# EAGLE board guava1_2 (EAGLE 8.0.0)
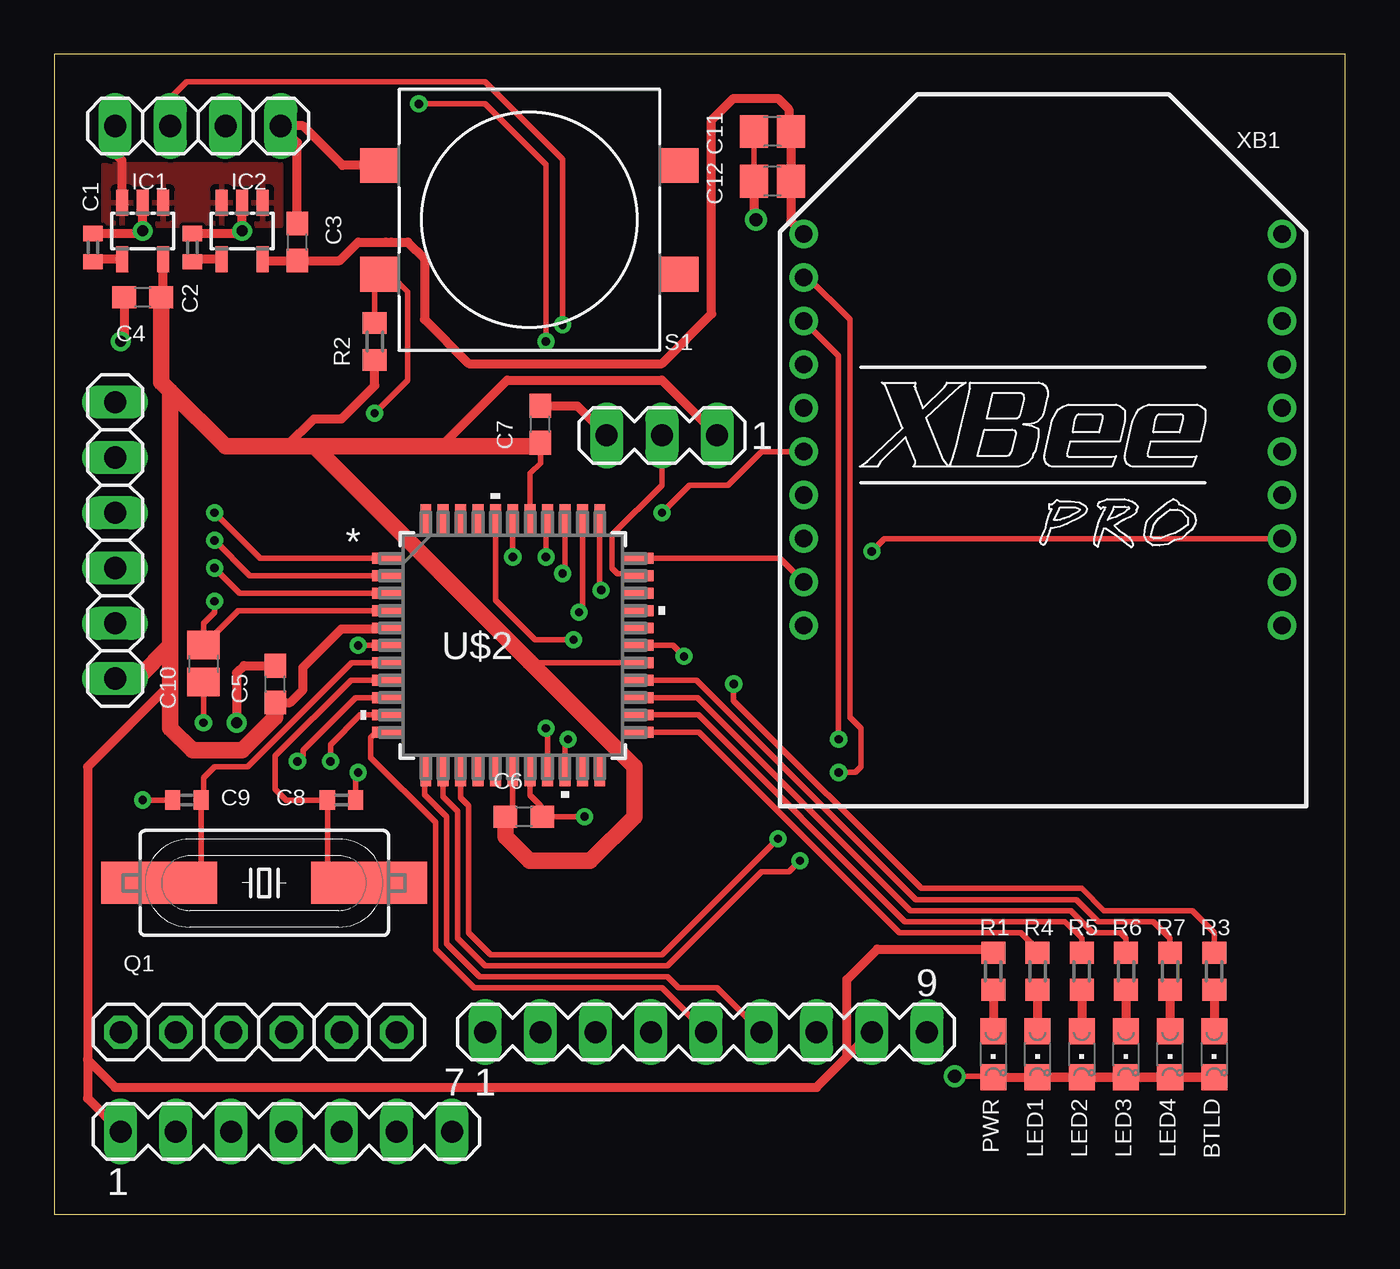
[diagram p0: board, top side]
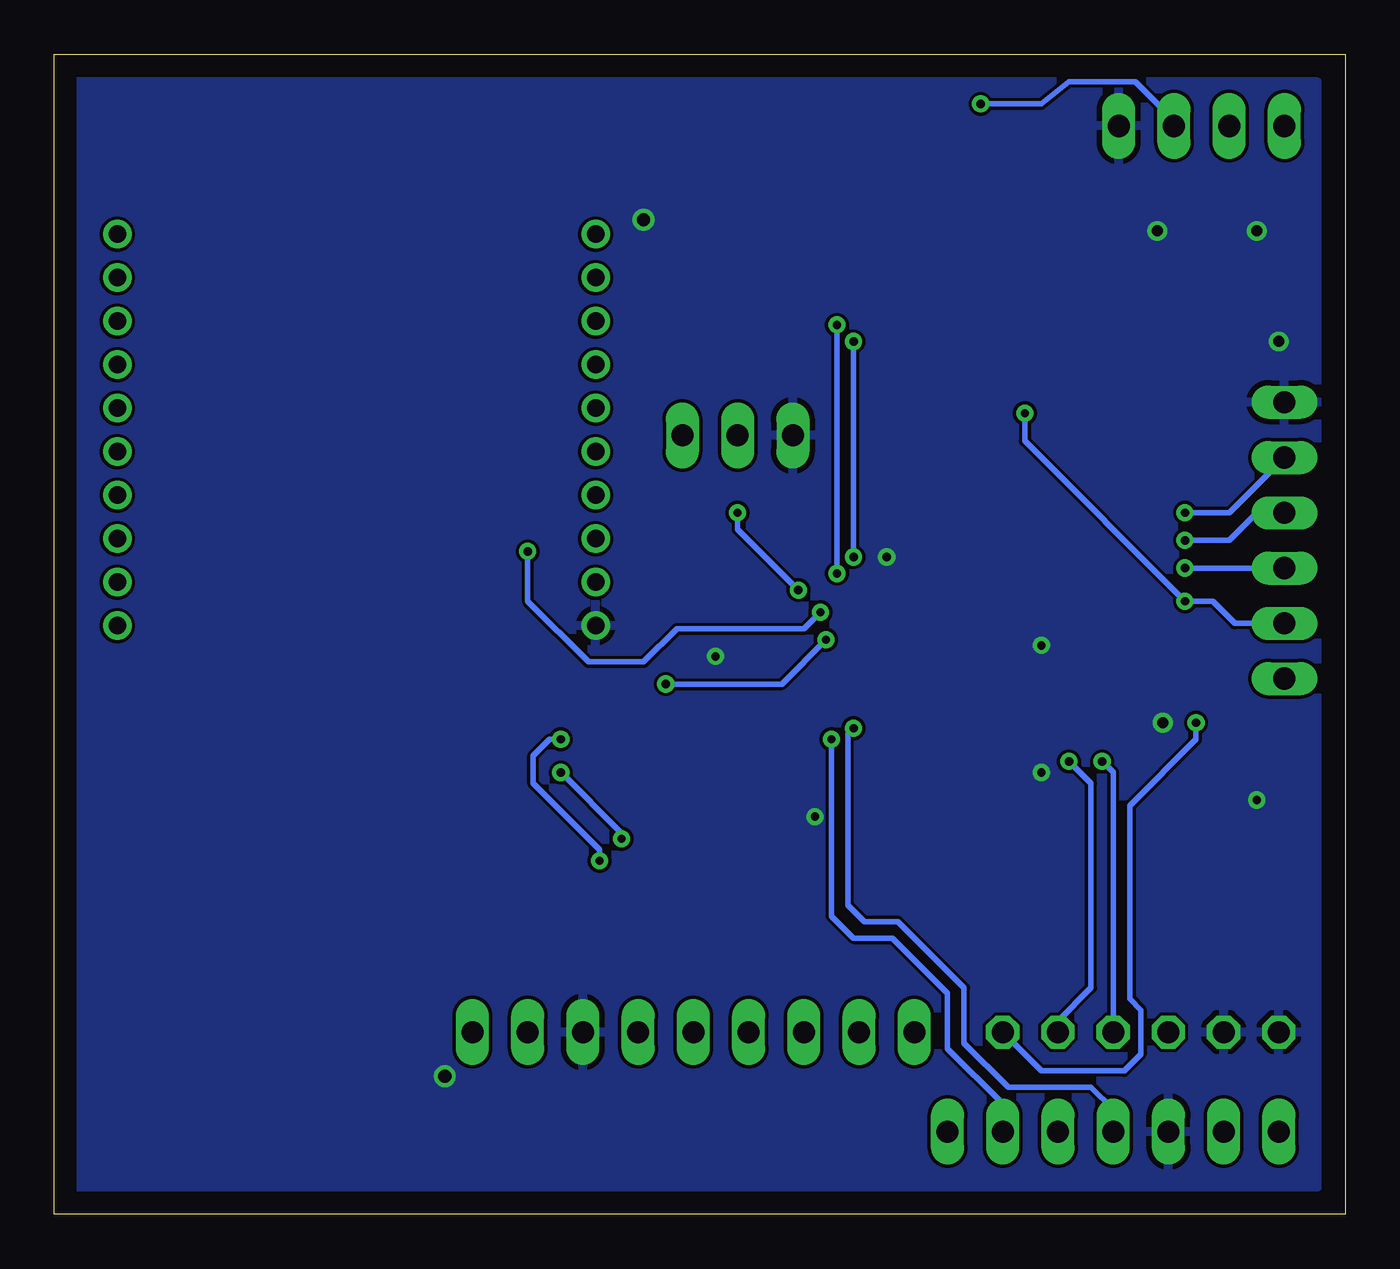
[diagram p1: board, bottom side, seen from below]

Size 59.36 x 53.33 mm. Coordinates in mm from the lower left corner, seen from the top.
Outline: 0,0 59.36,0 59.36,53.33 0,53.33 0,0
Copper layers (1*16): Top 0.035mm / dielectric 1.5mm / Bottom 0.035mm
Design rules "default *": minimum track width 6mil, minimum drill 6mil, track to track 6mil, track to pad 6mil, pad to pad 6mil, via to via 6mil, smd to smd 6mil, copper to edge 40mil, drill to drill 8mil, minimum pad ring 10mil, minimum via ring 8mil, stop-mask expansion 4mil, vias tented up to drill 0mil, thermal gap 10mil

## Footprints (pad centres in the part's own frame; a part is rotated, then mirrored left to right if it is on the bottom)
CHIPLED_0805 = smd 1.2 x 1.2: A 0,-1.05; C 0,1.05
C0402 = smd 0.7 x 0.9: 1 -0.65,0; 2 0.65,0
C0603 = smd 1.1 x 1: 1 -0.85,0; 2 0.85,0
C0805 = smd 1.3 x 1.5: 1 -0.85,0; 2 0.85,0
SOT23-5 = smd 0.55 x 1.2: 1 -0.95,-1.3; 2 0,-1.3; 3 0.95,-1.3; 4 0.95,1.3; 5 -0.95,1.3
1X04 = drill 1.016 long: 1 -3.81,0; 2 -1.27,0; 3 1.27,0; 4 3.81,0
1X06 = drill 1.016 long: 1 -6.35,0; 2 -3.81,0; 3 -1.27,0; 4 1.27,0; 5 3.81,0; 6 6.35,0
1X06' = drill 1.016 octagon: 1 -6.35,0; 2 -3.81,0; 3 -1.27,0; 4 1.27,0; 5 3.81,0; 6 6.35,0
HC49UP = smd 5.334 x 1.93: 1 -4.826,0; 2 4.826,0
R0603 = smd 1 x 1.1: 1 -0.85,0; 2 0.85,0
COM-12993 = smd 1.778 x 1.6: 1 -6.896,2.502; 2 6.896,2.502; 3 6.896,-2.502; 4 -6.896,-2.502
MA03-1 = drill 1.016 long: 1 -2.54,0; 2 0,0; 3 2.54,0
MA07-1 = drill 1.016 long: 1 -7.62,0; 2 -5.08,0; 3 -2.54,0; 4 0,0; 5 2.54,0; 6 5.08,0; 7 7.62,0
MA09-1 = drill 1.016 long: 1 -10.16,0; 2 -7.62,0; 3 -5.08,0; 4 -2.54,0; 5 0,0; 6 2.54,0; 7 5.08,0; 8 7.62,0; 9 10.16,0
44A = smd 1.461 x 0.501: 1 -5.75,4; 2 -5.75,3.2; 3 -5.75,2.4; 4 -5.75,1.6; 5 -5.75,0.8; 6 -5.75,0; 7 -5.75,-0.8; 8 -5.75,-1.6; 9 -5.75,-2.4; 10 -5.75,-3.2; 11 -5.75,-4; 23 5.75,-4; 24 5.75,-3.2; 25 5.75,-2.4; 26 5.75,-1.6; 27 5.75,-0.8; 28 5.75,0; 29 5.75,0.8; 30 5.75,1.6; 31 5.75,2.4; 32 5.75,3.2; 33 5.75,4 | smd 0.501 x 1.461: 12 -4,-5.75; 13 -3.2,-5.75; 14 -2.4,-5.75; 15 -1.6,-5.75; 16 -0.8,-5.75; 17 0,-5.75; 18 0.8,-5.75; 19 1.6,-5.75; 20 2.4,-5.75; 21 3.2,-5.75; 22 4,-5.75; 34 4,5.75; 35 3.2,5.75; 36 2.4,5.75; 37 1.6,5.75; 38 0.8,5.75; 39 0,5.75; 40 -0.8,5.75; 41 -1.6,5.75; 42 -2.4,5.75; 43 -3.2,5.75; 44 -4,5.75
XBEE-PRO = drill 0.8 pad 1.27: 1 -11,9; 2 -11,7; 3 -11,5; 4 -11,3; 5 -11,1; 6 -11,-1; 7 -11,-3; 8 -11,-5; 9 -11,-7; 10 -11,-9; 11 11,-9; 12 11,-7; 13 11,-5; 14 11,-3; 15 11,-1; 16 11,1; 17 11,3; 18 11,5; 19 11,7; 20 11,9

## Placement (x,y rotation side)
BTLD  [CHIPLED_0805]  53.34,7.37 180 top
C1  470pF  [C0402]  1.78,44.45 90 top
C2  470pF  [C0402]  6.35,44.45 90 top
C3  2.2uF  [C0603]  11.18,44.7 90 top
C4  2.2uF  [C0603]  4.06,42.16 180 top
C5  .1uF  [C0603]  10.16,24.38 90 top
C6  .1uF  [C0603]  21.59,18.29 0 top
C7  .1uF  [C0603]  22.35,36.32 90 top
C8  22pF  [C0402]  13.21,19.05 180 top
C9  22pF  [C0402]  6.1,19.05 0 top
C10  1uF  [C0805]  6.86,25.32 270 top
C11  1uF  [C0805]  33.02,49.78 180 top
C12  18pF  [C0805]  33.02,47.5 180 top
IC1  3.3V  [SOT23-5]  4.06,45.21 180 top
IC2  XB  [SOT23-5]  8.64,45.21 180 top
JP1  PWR  [1X04]  6.6,50.04 0 top
JP2  BTLD  [1X06]  2.79,30.99 90 top
JP3  PRGRM  [1X06']  9.4,8.38 180 top
LED1  GRN  [CHIPLED_0805]  45.21,7.37 180 top
LED2  GRN  [CHIPLED_0805]  47.24,7.37 180 top
LED3  GRN  [CHIPLED_0805]  49.28,7.37 180 top
LED4  GRN  [CHIPLED_0805]  51.31,7.37 180 top
PWR  GRN  [CHIPLED_0805]  43.18,7.37 180 top
Q1  8MHz  [HC49UP]  9.65,15.24 0 top
R1  1k  [R0603]  43.18,11.18 90 top
R2  10k  [R0603]  14.73,40.13 90 top
R3  1k  [R0603]  53.34,11.18 270 top
R4  1k  [R0603]  45.21,11.18 270 top
R5  1k  [R0603]  47.24,11.18 270 top
R6  1k  [R0603]  49.28,11.18 270 top
R7  1k  [R0603]  51.31,11.18 270 top
S1  [COM-12993]  21.84,45.72 180 top
SV1  SP-215  [MA03-1]  27.94,35.81 180 top
SV2  BME  [MA07-1]  10.67,3.81 0 top
SV3  GPS  [MA09-1]  29.97,8.38 0 top
U$1  [SCEL_LOGO_SMALL]  34.29,10.41 0 top
U$2  ATMEGA1284-AU  [44A]  21.08,26.16 0 top
XB1  XBEE-PRO  [XBEE-PRO]  45.47,36.07 0 top

## Library data of the parts
BTLD C1-C12 JP3 LED1-LED4 PWR R1-R7 = adafruit
IC1 IC2 = v-reg-micrel; OC_FARNELL: unknown; OC_NEWARK: unknown
JP1 JP2 = pinhead
Q1 = adafruit; OC_FARNELL: unknown; OC_NEWARK: unknown
S1 = SCEL-SWITCHES
SV1-SV3 = con-lstb; OC_FARNELL: unknown; OC_NEWARK: unknown
U$1 = SCEL-Logos
U$2 = atmega1284
XB1 = maxstream; MPN: XBP24-AWI-001; OC_FARNELL: 1337916; OC_NEWARK: 42M2667

## Nets
BATT_V: JP1.2 U$2.36
BME_SCK: SV2.4 U$2.19
BME_SDI: SV2.6 U$2.20
DTR: C10.2 JP3.1
F_RX: JP3.2 U$2.10
F_TX: JP3.3 U$2.9
GND: BTLD.C C1.2 C2.2 C3.2 C4.2 C5.2 C6.2 C7.2 C8.1 C9.1 C11.2 C12.2 IC1.2 IC2.2 JP1.4 JP2.6 JP3.5 JP3.6 LED1.C LED2.C LED3.C LED4.C PWR.C S1.3 SV1.3 SV2.3 SV3.7 U$2.6 U$2.18 U$2.28 U$2.39 XB1.10
GPS_RX: SV3.6 U$2.12
GPS_TX: SV3.5 U$2.11
LED1: R4.1 U$2.23
LED2: R5.1 U$2.24
LED3: R6.1 U$2.25
LED4: R7.1 U$2.26
MISO: JP2.4 U$2.2
MOSI: JP2.5 U$2.1
N$1: C8.2 Q1.2 U$2.8
N$2: C9.2 Q1.1 U$2.7
N$3: BTLD.A R3.2
N$4: R3.1 U$2.40
N$6: C1.1 IC1.4
N$7: PWR.A R1.1
N$8: LED4.A R7.2
N$9: LED2.A R5.2
N$10: LED3.A R6.2
N$11: LED1.A R4.2
N$14: C2.1 IC2.4
PV_V: JP1.3 U$2.37
PYRAN_ADC: SV1.2 U$2.32
RESET: C10.1 JP2.2 R2.2 S1.2 U$2.4
SCK: JP2.3 U$2.3
V_LOAD: IC1.1 IC1.3 IC2.1 IC2.3 JP1.1
V_REG: C4.1 C5.1 C6.1 C7.1 IC1.5 JP2.1 R1.2 R2.1 SV1.1 SV2.1 SV3.8 U$2.5 U$2.17 U$2.27 U$2.38
V_XBEE: C3.1 C11.1 C12.1 IC2.5 XB1.1
X_DTR: U$2.33 XB1.9
X_ON: U$2.35 XB1.13
X_RSSI: U$2.34 XB1.6
X_RX: U$2.13 XB1.3
X_TX: U$2.14 XB1.2

## Tracks (layer width: path | path; a pad name or v marks a point on that pad's centre or on a via)
BATT_V  (via drill 0.38)
  Top 0.254: v23.37,40.89 23.37,48.51 19.81,52.07 6.1,52.07 5.33,51.31 JP1.2 | U$2.36 23.48,29.58 v23.37,29.46
  Bottom 0.254: v23.37,40.89 v23.37,29.46
BME_SCK  (via drill 0.38)
  Top 0.254: U$2.19 22.68,22.28 v22.61,22.35
  Bottom 0.254: SV2.4 10.67,4.83 11.68,5.84 15.49,5.84 17.53,7.87 17.53,10.41 20.57,13.46 22.1,13.46 22.86,14.22 22.86,22.1 v22.61,22.35
BME_SDI  (via drill 0.38)
  Top 0.254: U$2.20 23.48,21.7 v23.62,21.84
  Bottom 0.254: SV2.6 15.75,5.08 18.29,7.62 18.29,10.16 20.83,12.7 22.61,12.7 23.62,13.72 v23.62,21.84
DTR  (via drill 0.38)
  Top 0.254: C10.2 v6.86,22.61
  Bottom 0.254: v6.86,22.61 6.86,21.84 9.91,18.8 9.91,9.91 9.4,9.4 9.4,7.37 10.16,6.6 13.97,6.6 JP3.1
F_RX  (via drill 0.38)
  Top 0.254: v12.7,20.83 12.7,21.59 14.07,22.96 U$2.10
  Bottom 0.254: JP3.2 13.21,8.89 11.68,10.41 11.68,19.81 v12.7,20.83
F_TX  (via drill 0.38)
  Top 0.254: v11.18,20.83 11.43,21.08 11.43,21.34 13.86,23.76 U$2.9
  Bottom 0.254: JP3.3 10.67,20.32 v11.18,20.83
GND  (via drill 0.38, 0.51, 0.51 pad 0.3, 0.6)
  Top 0.254: C11.2 C12.2 | PWR.C 43.21,6.35 v41.4,6.35 | C9.1 v4.06,19.05 | C8.1 13.86,20.21 v13.97,20.32 | U$2.18 21.88,19.27 22.35,18.8 22.35,18.38 C6.2 v24.38,18.29 | U$2.39 v21.08,30.23 | C5.2 10.16,25.4 | U$2.6 v13.97,26.16 | U$2.28 28.45,26.16 v28.96,25.65
  Top 0.406: PWR.C BTLD.C LED4.C LED3.C LED2.C LED1.C | IC1.2 v4.06,45.21 3.95,45.1 C1.2 | IC2.2 v8.64,45.21 8.52,45.1 C2.2 | C5.2 8.72,25.23 8.38,24.89 v8.38,22.61 | C12.2 32.17,45.81 v32.26,45.72 | C7.2 24.04,37.17 SV1.3 | C4.2 3.21,40.3 v3.05,40.13 | C3.2 11.18,49.28 JP1.4 11.43,50.04 13.25,48.22 S1.3
  pour Bottom: 1.27,52.07 58.42,52.07 58.42,1.27 1.27,1.27
GPS_RX
  Top 0.254: SV3.6 30.48,10.41 28.7,10.41 28.19,10.92 19.56,10.92 18.03,12.45 18.03,18.29 17.02,19.3 17.02,20.35 U$2.12
GPS_TX
  Top 0.254: SV3.5 27.94,10.41 19.3,10.41 17.53,12.19 17.53,18.03 14.55,21 14.55,21.92 14.73,22.1 15.27,22.1 U$2.11
LED1
  Top 0.254: R4.1 45.21,12.19 44.45,12.95 38.86,12.95 29.65,22.16 U$2.23
LED2
  Top 0.254: R5.1 47.24,12.7 46.48,13.46 39.12,13.46 29.62,22.96 U$2.24
LED3
  Top 0.254: R6.1 49.28,12.7 49.02,12.95 47.75,12.95 46.74,13.97 39.37,13.97 29.58,23.76 U$2.25
LED4
  Top 0.254: R7.1 51.31,12.7 50.55,13.46 48.01,13.46 46.99,14.48 39.62,14.48 29.54,24.56 U$2.26
MISO  (via drill 0.38)
  Top 0.254: U$2.2 8.99,29.36 v7.37,30.99
  Bottom 0.254: JP2.4 4.06,32.26 5.33,30.99 v7.37,30.99
MOSI  (via drill 0.38)
  Top 0.254: U$2.1 9.46,30.16 v7.37,32.26
  Bottom 0.254: JP2.5 5.33,32.26 v7.37,32.26
N$1
  Top 0.254: Q1.2 12.7,15.24 12.56,15.38 C8.2 10.67,19.05 10.16,19.56 10.16,21.08 13.64,24.56 U$2.8
N$2
  Top 0.254: Q1.1 6.35,15.24 6.75,15.64 C9.2 6.86,19.16 6.86,20.07 7.37,20.57 8.89,20.57 13.68,25.36 U$2.7
N$3
  Top 0.406: R3.2 BTLD.A
N$4  (via drill 0.38)
  Top 0.254: R3.1 53.34,12.95 52.32,13.97 48.26,13.97 47.24,14.99 39.88,14.99 31.24,23.62 v31.24,24.38 | U$2.40 20.28,28.23 22.1,26.42 v23.88,26.42
  Bottom 0.254: v23.88,26.42 25.91,24.38 v31.24,24.38
N$6
  Top 0.406: IC1.4 1.89,43.91 C1.1
N$7
  Top 0.406: R1.1 PWR.A
N$8
  Top 0.406: R7.2 LED4.A
N$9
  Top 0.406: R5.2 LED2.A
N$10
  Top 0.406: R6.2 LED3.A
N$11
  Top 0.406: R4.2 LED1.A
N$14
  Top 0.406: IC2.4 6.46,43.91 C2.1
PV_V  (via drill 0.38)
  Top 0.254: v16.76,51.05 19.81,51.05 22.61,48.26 v22.61,40.13 | U$2.37 22.61,31.91 v22.61,30.23
  Bottom 0.254: v16.76,51.05 13.97,51.05 12.7,52.07 9.65,52.07 7.87,50.29 JP1.3 | v22.61,30.23 v22.61,40.13
PYRAN_ADC
  Top 0.254: SV1.2 27.94,33.53 25.65,31.24 25.65,29.72 25.91,29.46 26.73,29.46 U$2.32
RESET  (via drill 0.38)
  Top 0.254: v7.37,28.19 7.37,27.69 6.86,27.18 C10.1 8.45,27.76 U$2.4 | R2.2 14.73,43 S1.2 15.46,43.22 16.26,42.42 16.26,38.35 v14.73,36.83
  Bottom 0.254: JP2.2 5.08,27.18 6.1,28.19 v7.37,28.19 14.73,35.56 v14.73,36.83
SCK  (via drill 0.38)
  Top 0.254: U$2.3 8.52,28.56 v7.37,29.72
  Bottom 0.254: v7.37,29.72 JP2.3
V_LOAD
  Top 0.406: IC1.3 3.11,48.45 2.79,48.77 JP1.1
  pour Top: 10.41,48.26 2.29,48.26 2.29,45.47 10.41,45.47
V_REG
  Top 0.254: U$2.27 21.88,25.36 21.84,25.4 | U$2.17 21.08,18.63 C6.1 | U$2.38 21.88,34.07 22.35,34.54 C7.1
  Top 0.406: IC1.5 5.01,42.26 C4.1 | C5.1 10.83,23.53 11.43,24.13 11.43,25.15 13.21,26.92 15.29,26.92 U$2.5 | 22.39,35.43 C7.1 | 5.33,24.38 1.52,20.57 1.52,7.11 | SV2.1 1.52,5.33 1.52,7.11 | 1.52,7.11 2.79,5.84 35.05,5.84 36.45,7.24 | 36.45,7.24 SV3.8 | 14.99,35.31 17.78,35.31 20.83,38.35 27.94,38.35 SV1.1 | 9.65,35.31 10.67,35.31 11.94,36.58 13.21,36.58 14.73,38.1 R2.1 | 36.45,7.24 36.45,10.79 37.85,12.19 43.01,12.19 R1.2
  Top 0.762: C5.1 10.16,22.86 8.64,21.34 6.35,21.34 5.33,22.35 5.33,24.38 5.33,26.16 | 5.33,37.85 5.33,26.16 | 5.33,26.16 3.81,24.64 JP2.1 | 5.33,37.85 7.87,35.31 9.65,35.31 11.94,35.31 | 11.94,35.31 14.99,35.31 22.19,35.31 C7.1 | 11.94,35.31 21.84,25.4 26.67,20.57 26.67,18.29 24.64,16.26 21.84,16.26 20.74,17.36 C6.1 | C4.1 4.91,38.27 5.33,37.85
V_XBEE
  Top 0.406: IC2.5 9.64,43.85 C3.1 13.12,43.85 13.97,44.7 15.24,44.7 | 15.24,44.7 15.49,44.7 | XB1.1 33.87,45.66 C12.1 C11.1 33.78,49.87 33.78,50.8 33.27,51.31 31.24,51.31 30.23,50.29 30.23,41.4 27.94,39.12 19.05,39.12 17.02,41.15 17.02,43.94 16.26,44.7 15.24,44.7
X_DTR
  Top 0.254: 34.13,29.4 XB1.9 33.37,30.16 U$2.33
X_ON  (via drill 0.38)
  Top 0.254: XB1.13 38.18,31.07 v37.59,30.48 | U$2.35 24.28,27.84 v24.13,27.69
  Bottom 0.254: v37.59,30.48 37.59,28.19 34.8,25.4 32.26,25.4 30.73,26.92 24.89,26.92 v24.13,27.69
X_RSSI  (via drill 0.38)
  Top 0.254: XB1.6 32.53,35.07 30.99,33.53 29.21,33.53 v27.94,32.26 | U$2.34 25.08,28.77 v25.15,28.7
  Bottom 0.254: 27.69,32.26 v27.94,32.26 27.94,31.5 v25.15,28.7
X_RX  (via drill 0.38)
  Top 0.254: v34.29,16.26 33.78,15.75 32.51,15.75 28.19,11.43 19.81,11.43 18.54,12.7 18.54,18.54 17.88,19.2 U$2.13 | v36.07,21.84 36.07,39.47 XB1.3
  Bottom 0.254: v34.29,16.26 34.29,16.76 37.34,19.81 37.34,21.08 36.58,21.84 v36.07,21.84
X_TX  (via drill 0.38)
  Top 0.254: XB1.2 34.66,43.07 36.58,41.15 36.58,22.86 37.08,22.35 37.08,20.57 36.83,20.32 v36.07,20.32 | U$2.14 18.68,19.16 19.05,18.8 19.05,12.95 20.07,11.94 27.94,11.94 v33.27,17.27
  Bottom 0.254: v33.27,17.27 33.27,17.53 v36.07,20.32

## Text on the board
tDocu: SMART CAMPUS ENERGY LAB | TEAM GUAVA | REV B